# Altium PCB PCB1Copy.PcbDoc
Units mm, origin at the board's own origin, x right, y up, seen from the top; angles counter-clockwise.
Board outline 91.9 x 76.4 mm, 2 copper layers (Top Layer, Bottom Layer), stack 0.211 mm thick; 44 components, 65 nets, 251 pads, 43 vias.
Unrouted connection lines stored in the file: 65.
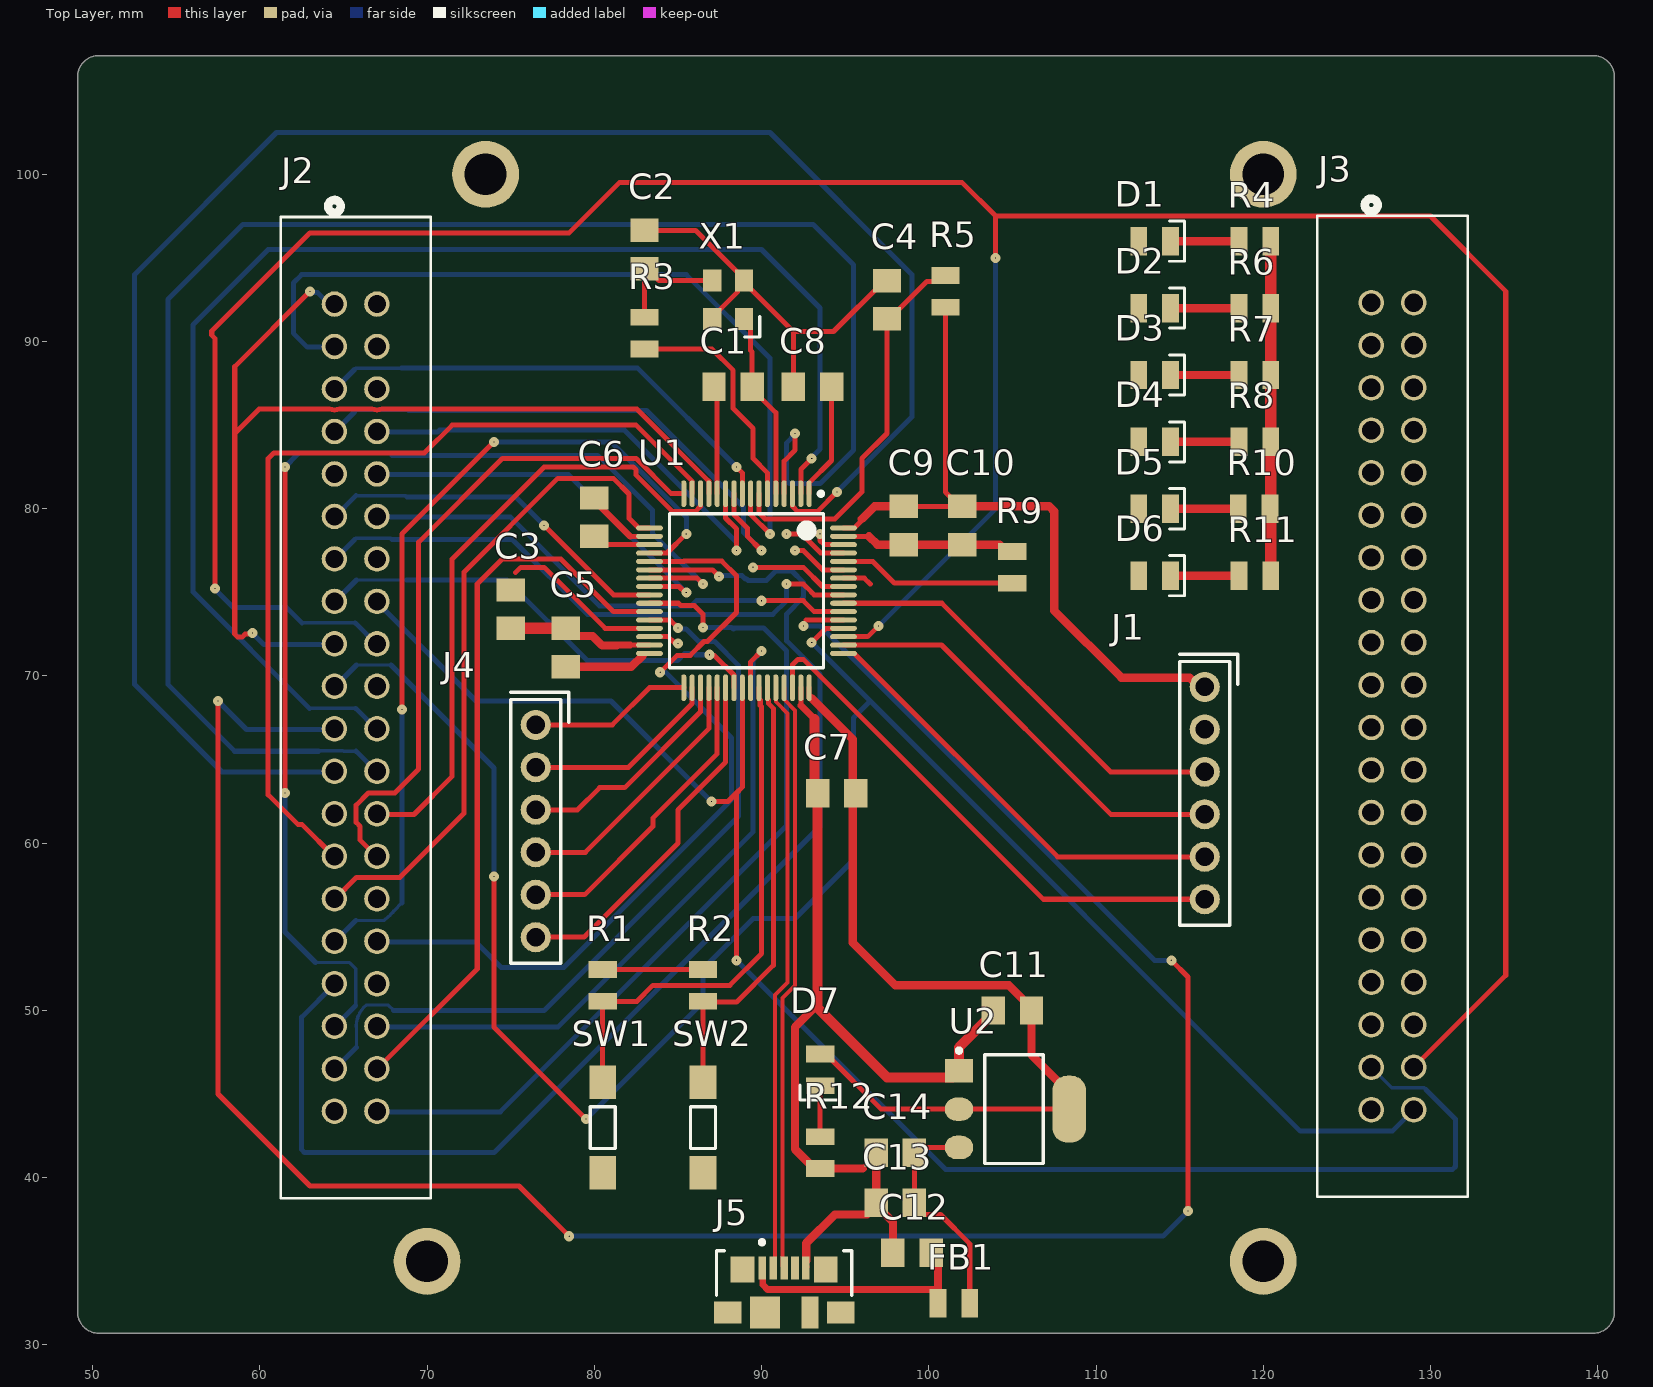
[diagram p0: Top Layer view]
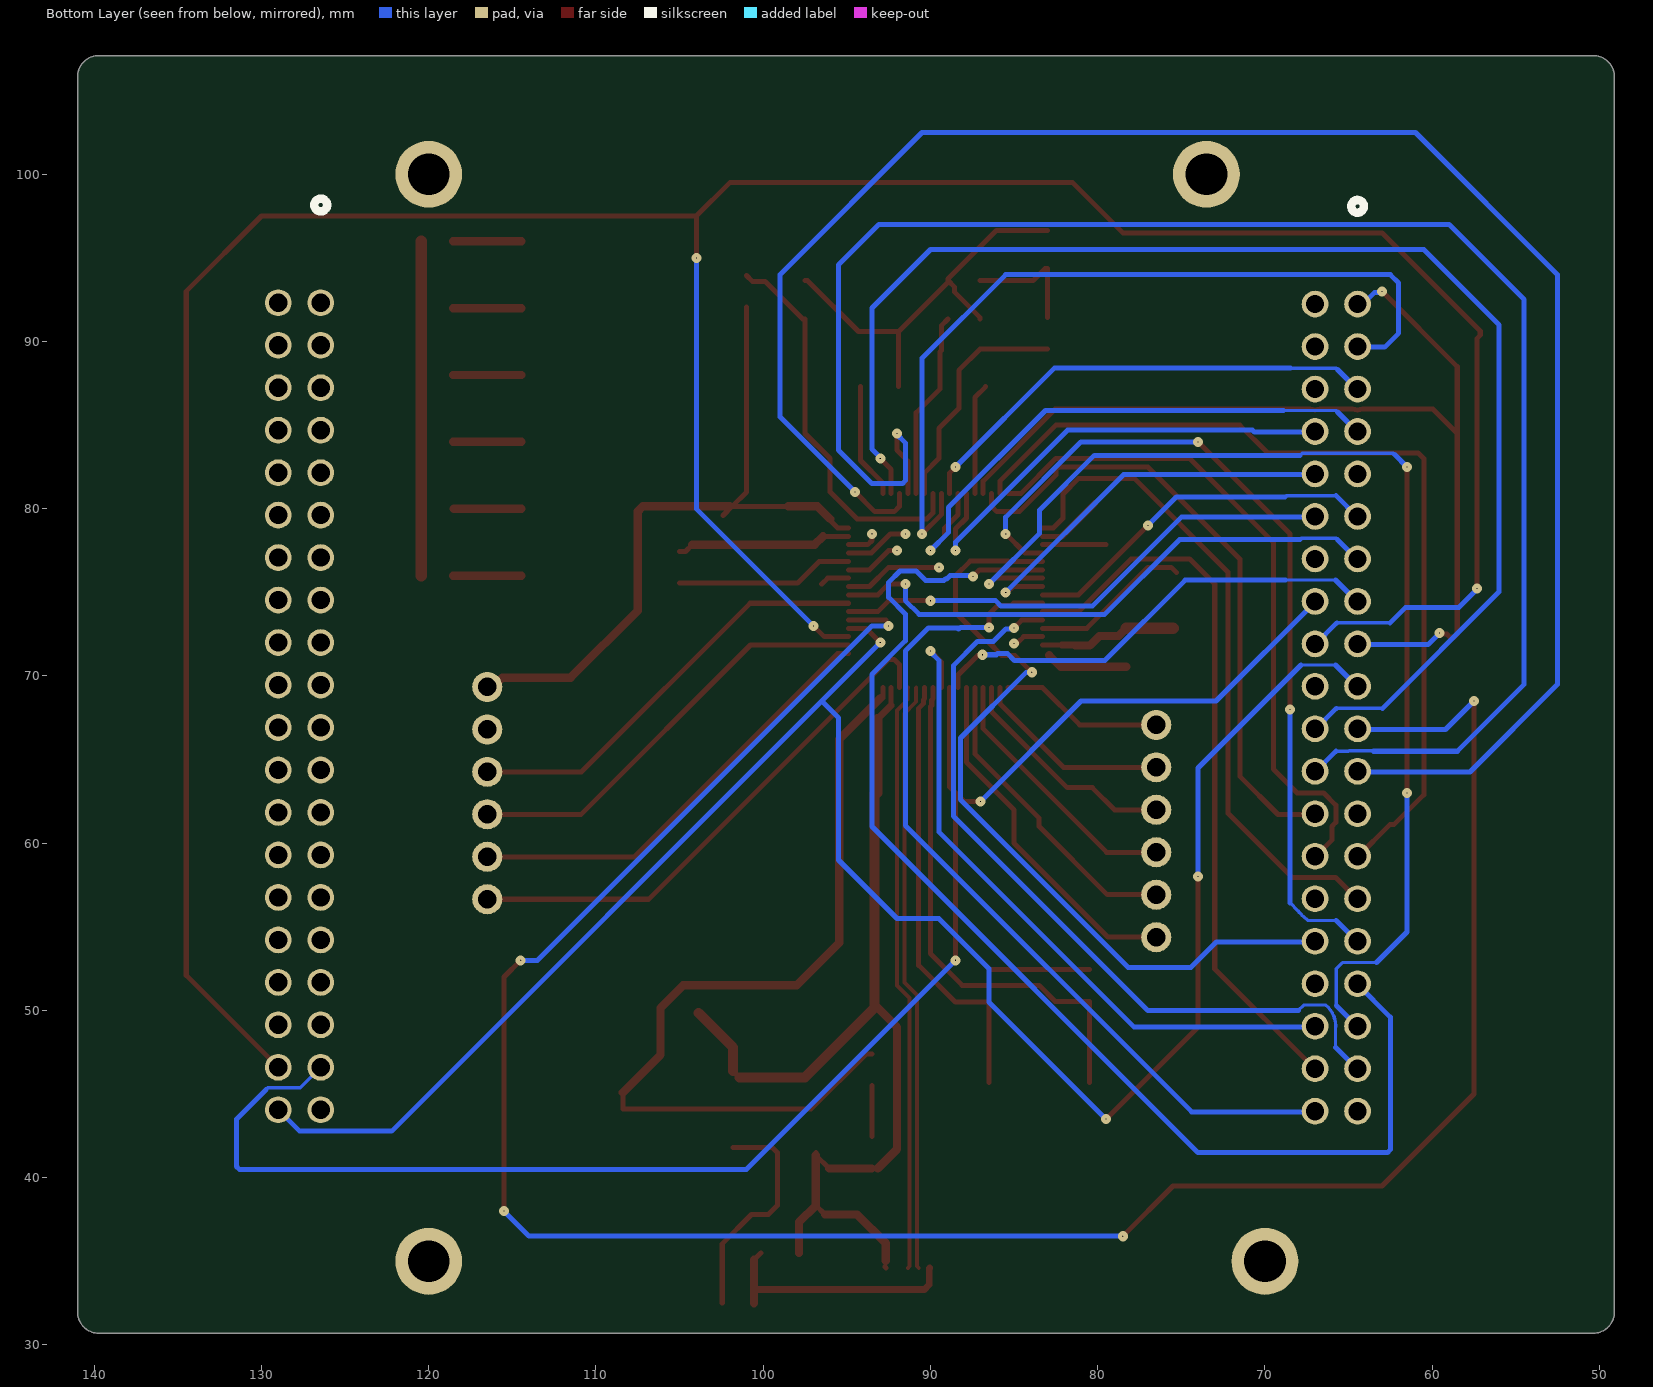
[diagram p1: Bottom Layer view, seen from below]
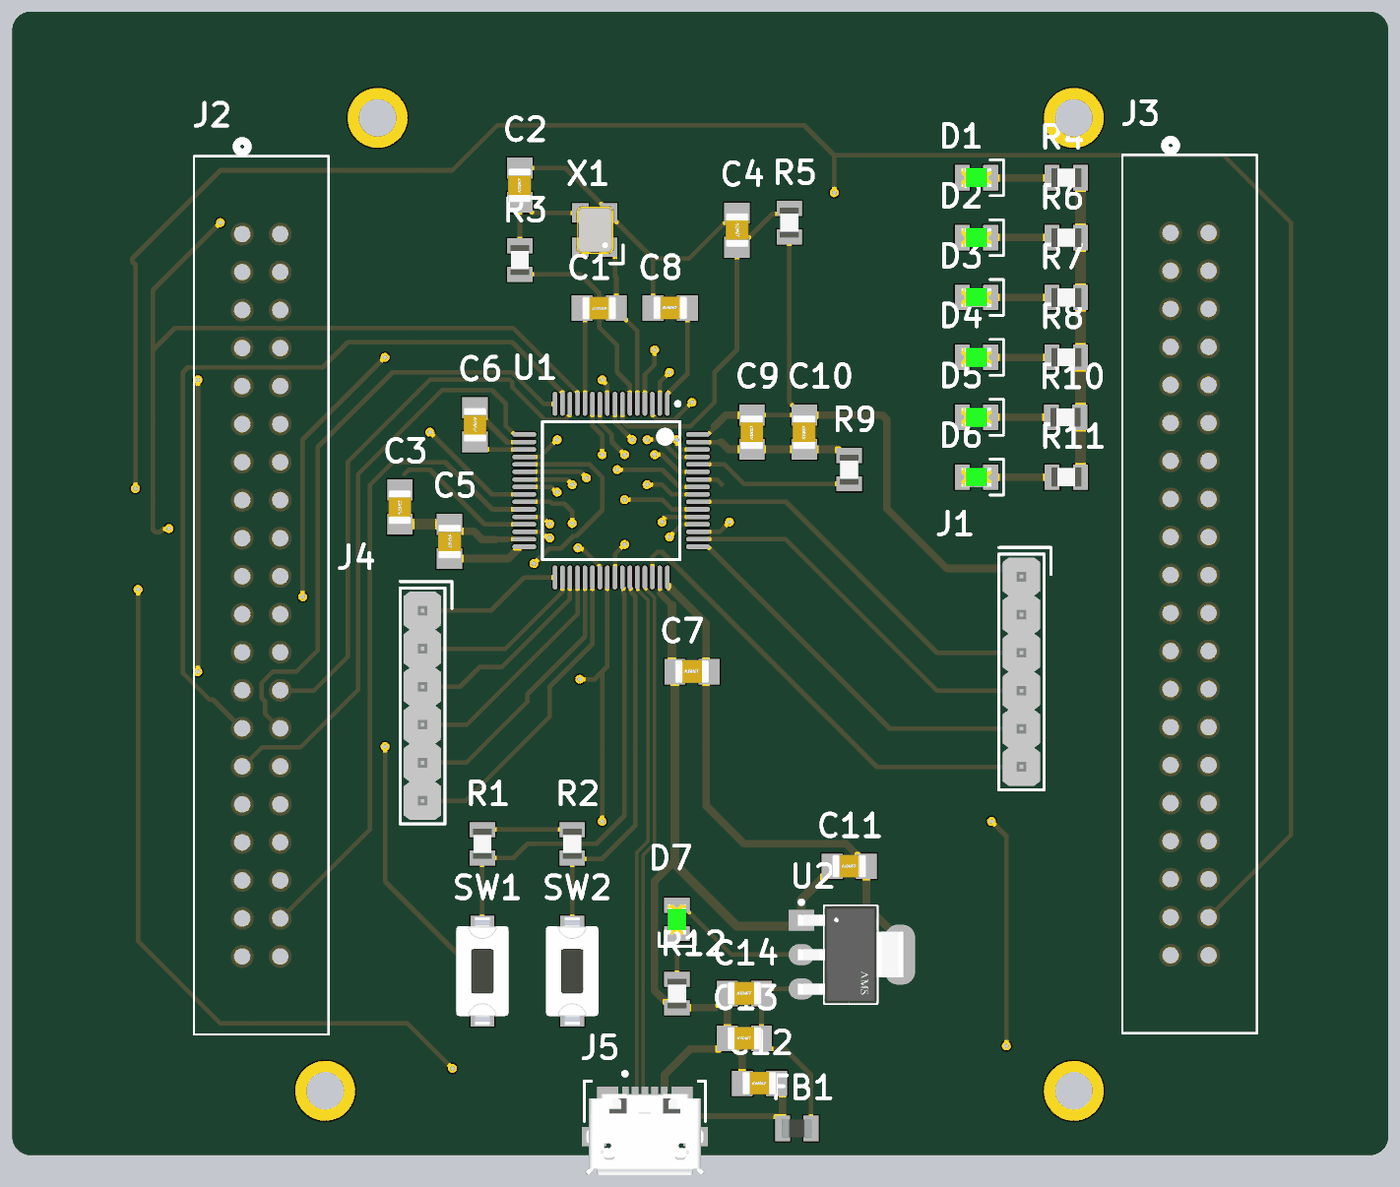
[diagram p2: 3D render of the assembled board from above, using the file's embedded part models]

## Layer stack, top to bottom
Top Solder: solder mask 0.0102, Solder Resist, Dk 3.5
Top Layer: signal copper 0.0356
Dielectric 1: core 0.1397, Core-017, Dk 4.1
Bottom Layer: signal copper 0.0356
Bottom Solder: solder mask 0.0102, Solder Resist, Dk 3.5

## Board outline
49.1,31.97 49.1,105.83 cw(c50.37,105.83) 50.37,107.1 139.73,107.1 cw(c139.73,105.83) 141,105.83 141,31.97 cw(c139.73,31.97) 139.73,30.7 50.37,30.7 cw(c50.37,31.97)

## Design rules (kind name [scope] priority, off if disabled: settings)
Clearance [All] p1: gap=0.254 ignorepadtopadclearanceinfootprint=FALSE except(0: Arc-Hole Track-Hole SMDPad-Hole THPad-Hole Via-Hole Fill-Hole Poly-Hole Region-Hole Text-Hole; 0.127: Arc-Arc Arc-Track Arc-SMDPad Track-Track Track-SMDPad SMDPad-SMDPad; 0.33: Arc-THPad Arc-Via Track-THPad Track-Via SMDPad-THPad SMDPad-Via THPad-Via Via-Via; 0.5: THPad-THPad)
DiffPairsRouting [All] p1: maxlimit=0.2 minlimit=0.2 mostfreqgap=0.2 toplayer_minwidth=0.235 toplayer_maxwidth=0.235 toplayer_prefwidth=0.235 bottomlayer_minwidth=0.235 bottomlayer_maxwidth=0.235 bottomlayer_prefwidth=0.235 impedanceprofiledriven=TRUE impedanceprofileid={3DAFF3E0-E45B-4C19-A753-60FD53768F31} impedanceprofilevalue=90.000000 maxuncoupledlength=12.7
PolygonConnect [All] p1: connectstyle=Direct reliefconductorwidth=0.254 reliefentries=4 polygonreliefangle="90 Angle" airgapwidth=0.254
RoutingVias [All] p1: holewidth=0.3 width=0.7 viastyle="Through Hole" minholewidth=0.25 minwidth=0.55 maxholewidth=0.4 maxwidth=0.9
SolderMaskExpansion [All] p1: expansion=0.102 istentingtop=FALSE
UnRoutedNet [All] p1: checkbadconnections=TRUE
Width [All] p1: maxlimit=1 minlimit=0.13 preferedwidth=0.3 minimp=50.000000 maximp=50.000000 favimp=50.000000
28 further rules are at their usual default settings.

## Classes and differential pairs
differential pair USB_D: +USB_D_P -USB_D_N

## Components (designator, comment, footprint, x,y, rotation, side; value= is the part's Value field where it differs from the comment)
C1 "28pF" CAP_0805 88.3,87.3 r180 top
C2 "28pF" CAP_0805 83,95.5 r90 top
C3 "2.2uF" CAP_0805 75,74 r90 top
C4 "100nF" CAP_0805 97.5,92.5 r270 top
C5 "100nF" CAP_0805 78.3,71.7 r270 top
C6 "100nF" CAP_0805 80,79.5 r270 top
C7 "100nF" CAP_0805 94.5,63 r0 top
C8 "100nF" CAP_0805 93.043,87.3 r0 top
C9 "100nF" CAP_0805 98.5,79 r90 top
C10 "2.2uF" CAP_0805 102,79 r90 top
C11 "22uF" CAP_0805 105,50 r0 top
C12 "2.2uF" CAP_0805 99,35.5 r0 top
C13 "2.2uF" CAP_0805 98,38.5 r0 top
C14 "22uF" CAP_0805 98,41.5 r0 top
D1 "GREEN" LED_0805_GREEN 113.5,96 r180 top
D2 "GREEN" LED_0805_GREEN 113.5,92 r180 top
D3 "GREEN" LED_0805_GREEN 113.5,88 r180 top
D4 "GREEN" LED_0805_GREEN 113.5,84 r180 top
D5 "GREEN" LED_0805_GREEN 113.5,80 r180 top
D6 "GREEN" LED_0805_GREEN 113.5,76 r180 top
D7 "GREEN" LED_0805_GREEN 93.5,46.45 r90 top
FB1 "120R" FB_0805 101.5,32.5 r0 top
J1 "G800W302018EU" G800W302018EU 116.5,63 r0 top
J2 "BUFFER_LOW" CONN_3020-40-0100-00_CNC 64.46,92.24 r270 top
J3 "BUFFER_HIGH" CONN_3020-40-0100-00_CNC 126.46,92.32 r270 top
J4 "G800W302018EU" G800W302018EU 76.5,60.73 r0 top
J5 "473460001" FP-473460001-MFG 91.35,32.29 r0 top
R1 "10k" RES_0805 80.5,51.5 r270 top
R2 "10k" RES_0805 86.5,51.5 r270 top
R3 "0R" RES_0805 83,90.5 r90 top
R4 "1k" RES_0805 119.5,96 r180 top
R5 "10k" RES_0805 101,93 r270 top
R6 "1k" RES_0805 119.5,92 r180 top
R7 "1k" RES_0805 119.5,88 r180 top
R8 "1k" RES_0805 119.5,84 r180 top
R9 "10k" RES_0805 105,76.5 r270 top
R10 "1k" RES_0805 119.45,80 r180 top
R11 "1k" RES_0805 119.5,76 r180 top
R12 "1k" RES_0805 93.5,41.5 r90 top
SW1 "DTSM-3" DTSM-3 80.5,43 r270 top
SW2 "DTSM-3" DTSM-3 86.5,43 r270 top
U1 "STM32F401RBT6TR" STM-LQFP64_L 89.1,75.1 r270 top
U2 "AMS1117-3.3" FP-AMS1117-IPC_C 105.1,44.1 r0 top
X1 "24MHz" XTAL_3225 88,92.5 r90 top

## Footprints (in the part's own frame and the unit in brackets; to place one, negate y for a bottom-side part, rotate by r counter-clockwise, add the part's x,y. Pads: shape width x height; smd on the part's side, far side on the other; paste and mask are expansions set on the pad)
CAP_0805 [mm]
  rect 1.4x1.7 smd: 1(-1.143,0) 2(1.143,0)
  body extent -1.15,-0.76 1.15,0.79, height 1.01
CONN_3020-40-0100-00_CNC [mil]
  round 60 / inner round 60 / far side round 63 hole 43 paste-31.5 mask-31.5: 1(0,0) 2(0,100) 3(100,0) 4(100,100) 5(200,0) 6(200,100) 7(300,0) 8(300,100) 9(400,0) 10(400,100) 11(500,0) 12(500,100) 13(600,0) 14(600,100) 15(700,0) 16(700,100) 17(800,0) 18(800,100) 19(900,0) 20(900,100) 21(1000,0) 22(1000,100) 23(1100,0) 24(1100,100) 25(1200,0) 26(1200,100) 27(1300,0) 28(1300,100) 29(1400,0) 30(1400,100) 31(1500,0) 32(1500,100) 33(1600,0) 34(1600,100) 35(1700,0) 36(1700,100) 37(1800,0) 38(1800,100) 39(1900,0) 40(1900,100)
  silkscreen extent -245,-127 2105,227
DTSM-3 [mm]
  rect 2x1.6 smd: 1(-2.7,0) 2(2.7,0)
  silkscreen extent -1.25,-0.75 1.25,0.75, body extent -3.6,-1.75 3.6,1.75, height 4.96
FB_0805 [mm]
  rect 1x1.7 smd: 1(-0.95,0) 2(0.95,0)
  body extent -1,-0.63 1,0.63, height 0.86
FP-473460001-MFG [mm]
  rect 0.45x1.38 smd paste+0 mask+0: 1(-1.3,2.31) 2(-0.65,2.31) 3(0,2.31) 4(0.65,2.31) 5(1.3,2.31)
  rect 1.425x1.55 smd paste+0 mask+0: 6(-2.488,2.225) 7(2.488,2.225)
  rect 1.65x1.3 smd paste+0 mask+0: 8(-3.375,-0.35) 11(3.375,-0.35)
  rect 1.8x1.9 smd paste+0 mask+0: 9(-1.15,-0.35)
  rect 1x1.9 smd paste+0 mask+0: 10(1.55,-0.35)
  silkscreen extent -4.05,0.67 4.05,3.97, body extent -4.3,-2.48 4.3,3.45, height 0.25
FP-AMS1117-IPC_C [mm]
  rect 1.7x1.4 smd paste+0 mask+0: 1(-3.295,2.29)
  rrect100% 1.7x1.4 smd paste+0 mask+0: 2(-3.295,0) 3(-3.295,-2.29)
  rrect87% 2.004x4 smd paste+0 mask+0: 4(3.295,0)
  silkscreen extent -3.42,-3.25 1.75,3.62, body extent -3.9,-3.35 3.9,3.35, height 0.25
G800W302018EU [mm]
  round 1.8 hole 1.1 mask+0.07: 1(0,6.35) 2(0,3.81) 3(0,1.27) 4(0,-1.27) 5(0,-3.81) 6(0,-6.35)
  silkscreen extent -1.5,-7.9 1.97,8.3, body extent -1.25,-7.62 1.25,7.62, height 8.61
LED_0805_GREEN [mm]
  rect 1x1.7 smd: A(0.95,0) K(-0.95,0)
  silkscreen extent -1.8,-1.2 -0.9,1.2, body extent -1,-0.63 1,0.63, height 1.12
RES_0805 [mm]
  rect 1x1.7 smd: 1(-0.95,0) 2(0.95,0)
  body extent -1,-0.63 1,0.63, height 0.47
STM-LQFP64_L [mm] "QFP, 64-Leads, Body 10x10mm, Pitch 0.5mm, IPC High Density"
  oval 1.6x0.3 smd: 1(-5.8,3.75) 2(-5.8,3.25) 3(-5.8,2.75) 4(-5.8,2.25) 5(-5.8,1.75) 6(-5.8,1.25) 7(-5.8,0.75) 8(-5.8,0.25) 9(-5.8,-0.25) 10(-5.8,-0.75) 11(-5.8,-1.25) 12(-5.8,-1.75) 13(-5.8,-2.25) 14(-5.8,-2.75) 15(-5.8,-3.25) 16(-5.8,-3.75) 33(5.8,-3.75) 34(5.8,-3.25) 35(5.8,-2.75) 36(5.8,-2.25) 37(5.8,-1.75) 38(5.8,-1.25) 39(5.8,-0.75) 40(5.8,-0.25) 41(5.8,0.25) 42(5.8,0.75) 43(5.8,1.25) 44(5.8,1.75) 45(5.8,2.25) 46(5.8,2.75) 47(5.8,3.25) 48(5.8,3.75)
  oval 0.3x1.6 smd: 17(-3.75,-5.8) 18(-3.25,-5.8) 19(-2.75,-5.8) 20(-2.25,-5.8) 21(-1.75,-5.8) 22(-1.25,-5.8) 23(-0.75,-5.8) 24(-0.25,-5.8) 25(0.25,-5.8) 26(0.75,-5.8) 27(1.25,-5.8) 28(1.75,-5.8) 29(2.25,-5.8) 30(2.75,-5.8) 31(3.25,-5.8) 32(3.75,-5.8) 49(3.75,5.8) 50(3.25,5.8) 51(2.75,5.8) 52(2.25,5.8) 53(1.75,5.8) 54(1.25,5.8) 55(0.75,5.8) 56(0.25,5.8) 57(-0.25,5.8) 58(-0.75,5.8) 59(-1.25,5.8) 60(-1.75,5.8) 61(-2.25,5.8) 62(-2.75,5.8) 63(-3.25,5.8) 64(-3.75,5.8)
  silkscreen extent -5.92,-4.6 4.6,4.6, body extent -5,-5 5,5, height 1.6
XTAL_3225 [mm]
  rect 1.3x1.1 smd: 1(-1.15,-0.95) 2(1.15,-0.95) 3(1.15,0.95) 4(-1.15,0.95)
  silkscreen extent -2.23,-1.89 -1,-1, body extent -1.6,-1.28 1.6,1.22, height 0.61

## Part data
C1 C2 C3 C4 C5 C6 C7 C8 C9 C10 C11 C12 C13 C14: library part CAP_0805_16V, "Capacitor SMD 0805 16V"
D1 D2 D3 D4 D5 D6 D7: library part LED_0805_GREEN, "LED 0805 GREEN SMD"
FB1: library part FB_0805, "Ferrite Bead SMD 0805"
J1 J4: "Pin Header 6 Position 2.54mm Pitch", Manufacturer=Amphenol, Manufacturer Part Number=G800W302018EU
J2 J3: library part 3020-40-0100-00, "No Description Available", Mfr_Name="CNC Tech", RefDes=RefDes, Type=Type
J5: library part CMP-2000-05246-2, "CONN RCPT USB2.0 MICRO B SMD R/A", Current Rating=1.8A, Manufacturer=Molex, Package=0, Temperature="-30°C to +85°C", Temperature Range High=+85°C, Temperature Range Low=-30°C, Voltage Rating=30V, Automotive=No, Category=Conn, ComponentLink2Description=Datasheet, ComponentLink2URL=https://www.molex.com/webdocs/datasheets/pdf/en-us/0473460001_IO_CONNECTORS.pdf, Conn Orientation="Right Angle", Contact Material=Gold,Nickel, Device Class L1=Connectors, Device Class L2="USB Connectors", Device Class L3=unset, Digikey Description="CONN RCPT USB2.0 MICRO B SMD R/A", Footprint Url=https://www.molex.com/pdm_docs/sd/473460001_sd.pdf, Height=2.945mm, Is Female=yes, Lead Free=Yes, Manufacturer Part Number=473460001, Number Of Contacts=5, Octopart=https://octopart.com/47346-0001-molex-7164928, Pitch=0.65mm, RoHS=TRUE, Shielding=true, Usb Standard="USB 2.0"
R1 R2 R3 R4 R5 R6 R7 R8 R9 R10 R11 R12: library part RES_0805, "Resistor SMD 0805"
SW1 SW2: "Tactile Switch SMD SPST", Manufacturer=Diptronics, Manufacturer Part Number=DTSM-3
U1: library part CMP-0243-00143-1, "ARM Cortex-M4 32-bit MCU+FPU, 128 KB Flash, 64 KB Internal RAM, 50 I/Os, 64-Pin LQFP, -40 to 85 degC, Tape and Reel", I/Os (High Current)=50, Operating Frequency(F) (Processor speed) (MHz)=84, Package Description=LQFP64, Package Reference="64-Pin Low-profile Quad Flat Package, Body 10 x 10 mm, Pitch 0.5 mm", Supply Voltage(Vcc) min (V)=1.7, ComponentLink1Description="Manufacturer URL", ComponentLink1URL=http://www.st.com/, ComponentLink2Description=Datasheet, ComponentLink2URL=http://www.st.com/st-web-ui/static/active/en/resource/technical/document/datasheet/DM00086815.pdf, Core="ARM Cortex-M4", DatasheetVersion="Rev. 5", FLASH Size (Prog) (kB)=128, Internal RAM Size (kB)=64, Mounting Technology="Surface Mount", Packing="Tape and Reel"
U2: library part CMP-209535-000001-1, "LDO Voltage Regulators 1A, 3.3V", Dropout Voltage=1.1V, Manufacturer="Advanced Monolithic Systems", Max Junction Temp=+125°C, Max Power Dissipation=1.2W, Max Supply Voltage=15V, Nominal Supply Current=5mA, Output Current=1A, Output Voltage=3.3V, Package=AMS1117, Temperature="-40°C to +125°C", Temperature Range Low=-40°C, Automotive=No, Category=IC, ComponentLink2Description=Datasheet, ComponentLink2URL=http://www.advanced-monolithic.com/pdf/ds1117.pdf, Device Class L1="Integrated Circuits (ICs)", Device Class L2="Power Management ICs", Device Class L3="Voltage Regulators - Linear", Height=1.8mm, Ipc Land Pattern Name=SOT229P700X180-4, Lead Free=Yes, Manufacturer Part Number=AMS1117-3.3, Number Of Outputs=1, Octopart=https://octopart.com/ams1117-3.3-advanced+monolithic+systems-25899300, Output Type=Fixed, RoHS=TRUE, Standoff Height=0.64mm, Temperature Range High=+125°C
X1: library part TSX-3225_24.0000MF15X-AC, "Crystal SMD 24MHz 10PPM 7pF 3225", Manufacturer=Epson, Manufacturer Part Number="TSX-3225 24.0000MF15X-AC"

## Free pads (board coordinates)
  round 4 hole 2.5: 1(70,35) 1(73.5,100) 1(120,35) 1(120,100)

## Via types
v1: diameter 0.6, hole 0, Top Layer to Bottom Layer, 43 vias

## Nets (pads, with @x,y where several pads share a name; then routed paths per layer and width w, separated by ;. In a path a pad name is that pad's centre, name@x,y a point inside that pad or via, vN(x,y) a via of type N, cw(c..) or ccw(c..) an arc to the next point about the centre after c; other vN are vias at no path point)
3V3: C5.2 C6.2 C7.2 C8.2 C9.2 C10.2 C11.2 D7.A J1.1 J2.1 J2.17 J3.1 J3.17 R5.2 SW1.2 SW2.2 U1.1 U1.13 U1.19 U1.32 U1.48 U1.64 U2.2 U2.4 | length 172.7
  Top Layer w0.3: v1(59.566,72.566) 59.509,72.509 59.128,72.509 58.943,72.324 58.676,72.324 58.5,72.5 58.5,84.5 ; v1(63,93) 58.5,88.5 58.5,84.5 ; C6.2@79.5,77.857 79.507,77.85 U1.19 ; U1.13 86.85,81.654 82.549,85.955 67.301,85.955 cw(c67,87.16) 66.699,85.955 64.761,85.955 cw(c64.46,87.16) 64.159,85.955 59.955,85.955 58.5,84.5 ; U1.48 92.85,68.685 U1.48@92.98,68.685 ; U1.1 92.85,81.55 94.186,82.886 C8.2 ; D7.A 93.85,47.4 97.15,44.1 U2.2 U2.4 U2.4@108.395,45.098 ; U1.64 95.55,78.85 96,79.3 96,79.388 ; 96.755,80.143 96.843,80.143 ; C9.2 C10.2@101.85,80.143 ; R5.2 101,80.993 C10.2@101.85,80.143 ; C10.2@102.4,79.593 C10.2@101.85,80.143 ; C11.2 C11.2@106.143,50.15
  Top Layer w0.5: C5.2 82.219,70.557 U1.32@82.9,71.238 ; U1.48@92.98,68.685 95.443,66.222 95.443,54.057 98,51.5 104.793,51.5 C11.2@106.143,50.15 ; 96,79.388 96.755,80.143 ; 96.843,80.143 C9.2 ; C10.2 107.207,80.143 107.5,79.85 107.5,73.912 111.512,69.9 115.598,69.9 116.148,69.35 J1.1 ; C11.2 106.143,47.35 U2.4@108.395,45.098
  Bottom Layer w0.3: v1(59.566,72.566) 59.566,72.549 60.235,71.88 J2.17@64.46,71.88 ; v1(63,93) 63.057,92.943 63.435,92.943 64.177,92.2 J2.1@64.46,92.2
5V: C13.2 C14.2 FB1.2 U2.3 | length 13.8
  Top Layer w0.3: U2.3 99.453,41.81 C14.2 C13.2 99.143,38.35 99.693,37.8 100.7,37.8 102.45,36.05 FB1.2
GND: C1.2 C2.2 C3.1 C4.1 C5.1 C6.1 C7.1 C8.1 C9.1 C10.1 C11.1 C12.1 C13.1 C14.1 J1.2 J2.6 J2.9 J2.14 J2.20 J2.25 J2.30 J2.34 J2.39 J3.6 J3.9 J3.14 J3.20 J3.25 J3.30 J3.34 J3.39 J5.5 R1.1 R2.1 R4.1 R6.1 R7.1 R8.1 R9.1 R10.1 R11.1 R12.1 U1.12 U1.18 U1.31 U1.47 U1.63 U2.1 X1.2 X1.4 | length 141.9
  Top Layer w0.3: C5.1@78.286,72.857 C5.1 ; R1.1 R2.1 ; 82.148,71.852 82.15,71.85 U1.31 ; 82.15,78.35 U1.18 ; C2.2 86.057,96.643 88.95,93.75 X1.2 ; C1.2@86.7,87.3 87.35,86.65 U1.12 ; X1.4 87.05,91.45 88.55,92.95 88.55,93.25 X1.2 ; C8.1 91.9,90.6 ; 92.35,68.239 U1.47 ; J5.5 J5.5@92.725,34.675 ; R12.1@93.15,40.55 R12.1 ; U1.63 96.428,78.35 ; 96.057,40.55 96.857,41.35 C14.1 ; C13.1@96.307,37.8 96.857,38.35 C13.1 ; C4.1 97.35,93.643 94.307,90.6 91.9,90.6 ; U2.1@101.415,46 U2.1 ; C11.1@103.857,49.85 C11.1 ; R9.1@104.243,77.857 104.65,77.45 R9.1 ; X1.2 88.95,93.55 91.9,90.6
  Top Layer w0.4: C6.1@80.176,80.324 82.15,78.35 ; 81.347,71.823 81.376,71.852 82.148,71.852 ; 92.35,68.239 93.157,67.432
  Top Layer w0.5: C5.1 78.75,72.393 79.9,72.393 80.47,71.823 81.347,71.823 ; J5.5@92.669,35.04 92.669,36.082 94.388,37.8 C13.1@96.307,37.8 ; R12.1@93.15,40.55 92,41.7 92,49 93.357,50.357 ; R12.1 96.057,40.55 ; 96.428,78.35 96.922,77.857 C9.1 C10.1 R9.1@104.243,77.857 ; C13.1@96.857,38.35 97.857,37.35 C12.1 ; C13.1 C14.1@96.857,41.35
  Top Layer w0.6: C7.1@93.157,63 93.157,67.432 ; C7.1 93.357,50.143 97.5,46 U2.1@101.415,46 ; U2.1 101.805,47.798 C11.1@103.857,49.85
  Top Layer w0.7: C3.1@75.5,72.857 C5.1@78.286,72.857 ; R11.1 R8.1 R7.1 R6.1 R4.1
GPIO_3: J2.3 J3.26 U1.8 | length 50
  Top Layer w0.3: U1.8 89.35,79.65 v1(90.5,78.5)
  Bottom Layer w0.3: J2.3@64.46,89.66 62.84,89.66 62,90.5 62,93.5 62.5,94 85.5,94 90.5,89 v1(90.5,78.5)
GPIO_5: J2.5 J3.27 U1.9 | length 28.8
  Top Layer w0.3: v1(88.5,82.5) 88.85,82.15 U1.9
  Bottom Layer w0.2: 65.664,88.324 65.738,88.398 68.458,88.398
  Bottom Layer w0.3: J2.5@64.46,87.12 65.664,88.324 ; 68.458,88.425 82.575,88.425 v1(88.5,82.5)
GPIO_7: J2.7 J3.28 U1.10 | length 34.5
  Top Layer w0.3: U1.10 88.35,79.65 89.146,78.854 89.146,78.354 v1(90,77.5)
  Bottom Layer w0.2: 65.664,85.784 65.759,85.879 68.879,85.879
  Bottom Layer w0.3: J2.7@64.46,84.58 65.664,85.784 ; 68.879,85.879 83.121,85.879 88.927,80.073 88.927,78.573 v1(90,77.5)
GPIO_8: J2.8 J3.29 U1.11 | length 28.5
  Top Layer w0.3: U1.11 87.85,79.45 88.5,78.8 v1(88.5,77.5)
  Bottom Layer w0.3: J2.8@67,84.58 70.634,84.58 70.758,84.704 81.796,84.704 88.5,78 v1(88.5,77.5)
GPIO_10: J2.10 J3.31 U1.24 | length 23.8
  Top Layer w0.3: U1.24 85.069,75.35 85.419,75 v1(85.5,75)
  Bottom Layer w0.3: J2.10@67,82.04 78.46,82.04 v1(85.5,75)
GPIO_11: J2.11 J3.32 U1.25 | length 21.8
  Top Layer w0.3: v1(77,79) 81.15,74.85 U1.25
  Bottom Layer w0.2: 65.743,80.783 68.717,80.783 68.796,80.704
  Bottom Layer w0.3: J2.11@64.46,79.5 65.743,80.783 ; 68.796,80.704 75.296,80.704 v1(77,79)
GPIO_12: J2.12 J3.33 U1.54 | length 30.5
  Top Layer w0.3: v1(90,74.5) 92.5,74.5 93.15,73.85 U1.54
  Bottom Layer w0.3: J2.12@67,79.5 75,79.5 80.325,74.175 85.778,74.175 86.103,74.5 v1(90,74.5)
GPIO_13: J2.13 J3.35 U1.56 | length 34.5
  Top Layer w0.3: v1(91.5,75.5) 92.5,75.5 93,75 ; 93.001,74.999 93.15,74.85 U1.56
  Bottom Layer w0.2: 65.655,78.155 65.73,78.23 67.831,78.23 67.906,78.155
  Bottom Layer w0.3: J2.13@64.46,76.96 65.655,78.155 ; 67.906,78.155 75.111,78.155 79.583,73.683 90.679,73.683 91.5,74.504 v1(91.5,75.5)
GPIO_15: J2.15 J3.36 U1.39 | length 27.9
  Top Layer w0.3: v1(86.878,71.271) 86.936,71.213 87.191,71.213 88.35,70.054 U1.39
  Bottom Layer w0.2: 65.778,75.738 68.762,75.738 68.773,75.727
  Bottom Layer w0.3: J2.15@64.46,74.42 65.778,75.738 ; 68.773,75.727 74.773,75.727 79.573,70.927 84.981,70.927 85.408,71.354 85.978,71.354 86.062,71.271 v1(86.878,71.271)
GPIO_16: J2.16 J3.37 U1.40 | length 100.7
  Top Layer w0.3: v1(87,62.5) 87.002,62.498 87.998,62.498 88.5,63 ; v1(88.5,53) 88.5,63 ; U1.40 88.85,63.35 88.5,63
  Bottom Layer w0.2: J3.37 127.69,45.37 129.63,45.37 129.736,45.264
  Bottom Layer w0.3: J2.16@67,74.42 72.92,68.5 81,68.5 v1(87,62.5) ; v1(88.5,53) 101,40.5 131.324,40.5 131.5,40.676 131.5,43.5 129.736,45.264 ; J3.37 J3.37@126.674,46.6
GPIO_18: J2.18 J3.38 U1.51 | length 188.5
  Top Layer w0.3: v1(57.327,75.237) 57.327,90.173 57.124,90.376 57.124,90.624 63,96.5 78.5,96.5 81.5,99.5 102,99.5 104,97.5 ; U1.51 96.35,72.35 v1(97,73) ; v1(104,95) 104,97.5 ; J3.38 134.5,52.1 134.5,93 130,97.5 104,97.5
  Bottom Layer w0.2: 62.513,73.177 65.703,73.177
  Bottom Layer w0.3: v1@57.5,75 58.392,74.108 61.582,74.108 62.513,73.177 ; 65.703,73.177 J2.18@67,71.88 ; v1(97,73) 104,80 v1(104,95)
GPIO_19: J2.19 J3.40 U1.52 | length 120.3
  Top Layer w0.3: v1(74,58) 74,49 v1(79.5,43.5) ; v1(93,72) 93.85,72.85 U1.52
  Bottom Layer w0.2: 65.781,70.661 67.839,70.661
  Bottom Layer w0.3: J2.19@64.46,69.34 65.781,70.661 ; 67.839,70.661 74,64.5 v1(74,58) ; v1(79.5,43.5) 86.5,50.5 86.5,52.5 89.5,55.5 92,55.5 95.5,59 95.5,67.5 96.5,68.5 ; v1(93,72) 96.5,68.5 ; J3.40 127.72,42.78 122.22,42.78 96.5,68.5
GPIO_21: J2.21 J3.3 U1.53 | length 141.3
  Top Layer w0.3: v1(57.5,68.5) 57.5,45 63,39.5 75.5,39.5 v1(78.5,36.5) ; 92.65,73.35 U1.53 ; v1(114.5,53) 115.5,52 v1(115.5,38)
  Bottom Layer w0.3: v1(57.5,68.5) 59.2,66.8 J2.21@64.46,66.8 ; v1(78.5,36.5) 114,36.5 v1(115.5,38) ; v1(92.5,73) 93.5,73 113.5,53 v1(114.5,53)
GPIO_22: J2.22 J3.5 U1.2 | length 82.8
  Top Layer w0.3: U1.2 92.35,82.35 v1(93,83)
  Bottom Layer w0.2: 62.959,68.071 65.729,68.071
  Bottom Layer w0.3: 62.959,68.071 55.999,75.03 55.999,90.999 60.5,95.5 90,95.5 93.5,92 93.5,83.561 93,83.061 v1(93,83) ; 65.729,68.071 J2.22@67,66.8
GPIO_23: J2.23 J3.7 U1.3 | length 111.1
  Top Layer w0.3: U1.3 91.85,80.146 92.173,79.823 93.323,79.823 v1(94.5,81)
  Bottom Layer w0.3: J2.23@64.46,64.26 57.74,64.26 52.5,69.5 52.5,94 61,102.5 90.5,102.5 99,94 99,85.5 v1(94.5,81)
GPIO_24: J2.24 J3.8 U1.4 | length 104.5
  Top Layer w0.3: U1.4 91.35,82.85 92,83.5 v1(92,84.5)
  Bottom Layer w0.2: 63.5,65.5 63.53,65.53 64.97,65.53 65,65.5 65.76,65.5
  Bottom Layer w0.3: 63.5,65.5 58.5,65.5 54.5,69.5 54.5,92.515 58.985,97 93.085,97 95.5,94.585 95.5,83.5 93.5,81.5 91.676,81.5 91.5,81.676 91.5,83.939 92,84.439 v1(92,84.5) ; 65.76,65.5 J2.24@67,64.26
GPIO_26: J2.26 J3.10 U1.14 | length 37.8
  Top Layer w0.3: J2.26@67,61.72 69.22,61.72 71.5,64 71.5,77 77,82.5 82.324,82.5 82.5,82.324 82.5,82.004 84.681,79.823 86.027,79.823 86.35,80.146 U1.14
GPIO_27: J2.27 J3.11 U1.15 | length 53.9
  Top Layer w0.3: 63.136,83.338 60.838,83.338 60.5,83 60.5,62.897 62.269,61.128 62.512,61.128 J2.27@64.46,59.18 ; 63.136,83.342 63.139,83.338 69.838,83.338 71.5,85 82.504,85 85.85,81.654 U1.15
GPIO_28: J2.28 J3.12 U1.16 | length 40.6
  Top Layer w0.3: J2.28@67,59.18 66,60.18 66,61.004 65.758,61.246 65.758,62.274 66.491,63.008 68.067,63.008 69.5,64.441 69.5,78 74.5,83 82.5,83 84.6,80.9 U1.16
GPIO_29: J2.29 J3.13 U1.17 | length 39.8
  Top Layer w0.3: J2.29@64.46,56.64 65.778,57.958 68.377,57.958 72.212,61.793 72.212,76.212 77.822,81.822 81.135,81.822 82.07,80.887 82.07,79.43 82.65,78.85 U1.17
GPIO_31: J2.31 J3.15 U1.20 | length 51.9
  Top Layer w0.3: v1(68.5,68) 68.5,78.5 v1(74,84) ; U1.20 84.35,77.35 v1(85.5,78.5)
  Bottom Layer w0.2: 65.743,55.383 67.445,55.383 67.674,55.611 ccw(c67,56.64) 68.029,55.966 68.5,56.437
  Bottom Layer w0.3: J2.31@64.46,54.1 65.743,55.383 ; 68.5,56.437 v1(68.5,68) ; v1(74,84) 81,84 85.5,79.5 v1(85.5,78.5)
GPIO_32: J2.32 J3.16 U1.21 | length 49.4
  Top Layer w0.3: U1.21 85.35,76.85 85.367,76.867 87.629,76.867 88.5,75.996 88.5,73.8 86.758,72.058 86.563,72.058 85.742,71.238 84.956,71.238 v1(83.941,70.223)
  Bottom Layer w0.3: J2.32@67,54.1 72.9,54.1 74.427,52.573 78.176,52.573 88.204,62.601 88.204,66.296 84.277,70.223 v1(83.941,70.223)
GPIO_33: J2.33 J3.18 U1.22 | length 75.7
  Top Layer w0.3: U1.22 87.069,76.35 87.446,75.973 v1(87.446,75.946)
  Bottom Layer w0.3: J2.33@64.46,51.56 62.5,49.6 62.5,41.676 62.676,41.5 74,41.5 93.5,61 93.5,70.104 91.5,72.104 91.5,73.706 92.5,74.706 92.5,75.603 91.823,76.28 90.856,76.28 90.296,75.72 89.177,75.72 89.101,75.796 89.038,75.796 88.834,76 87.5,76 v1(87.446,75.946)
GPIO_35: J2.35 J3.19 U1.23 | length 69.7
  Top Layer w0.3: v1(61.5,63) v1(61.5,82.5) ; U1.23 86.15,75.85 v1(86.5,75.5)
  Bottom Layer w0.2: 62.244,83.244 62.31,83.31 67.771,83.31 67.89,83.192 ; 63.331,52.866 65.362,52.866 65.731,52.497 65.731,50.291
  Bottom Layer w0.3: v1(61.5,63) 61.5,54.696 63.331,52.866 ; v1(61.5,82.5) 62.244,83.244 ; J2.35@64.46,49.02 65.731,50.291 ; 67.89,83.192 80.204,83.192 83.471,79.925 83.471,78.529 v1(86.5,75.5)
GPIO_36: J2.36 J3.21 U1.41 | length 40.8
  Top Layer w0.3: U1.41 89.35,70.85 v1(90,71.5)
  Bottom Layer w0.3: J2.36@67,49.02 77.84,49.02 89.5,60.68 89.5,70.939 90,71.439 v1(90,71.5)
GPIO_37: J2.37 J3.22 U1.28 | length 47.3
  Top Layer w0.3: U1.28 84.55,73.35 84.55,73.327 v1(85,72.877)
  Bottom Layer w0.2: 65.778,48.881 cw(c67.385,49.064) 66.37,50.323 67.677,50.323 68,50 ; 65.778,47.798 65.778,48.881
  Bottom Layer w0.3: J2.37@64.46,46.48 65.778,47.798 ; 68,50 77,50 88.631,61.631 88.631,70.621 87.194,72.058 86.242,72.058 85.481,72.82 85.057,72.82 v1(85,72.877)
GPIO_38: J2.38 J3.23 U1.27 | length 43.7
  Top Layer w0.3: J2.38@67,46.48 73,52.48 73,75.5 74.5,77 78,77 81.15,73.85 U1.27
GPIO_40: J2.40 J3.24 U1.26 | length 51.9
  Top Layer w0.3: U1.26 85.047,74.35 85.177,74.22 85.98,74.22 86.5,73.7 v1(86.5,72.903)
  Bottom Layer w0.3: J2.40@67,43.94 74.375,43.94 91.5,61.065 91.5,71.5 90.131,72.869 88.393,72.869 88.32,72.796 88.212,72.903 v1(86.5,72.903)
LED_1: D1.A U1.57 | length 5.9
  Top Layer w0.3: v1(89.5,76.5) 92.5,76.5 93.65,75.35 U1.57
LED_2: D2.A U1.58 | length 1.7
  Top Layer w0.3: U1.58 96.15,75.85 96.5,75.5
LED_3: D3.A U1.59 | length 3.4
  Top Layer w0.3: v1(92,77.5) 92.5,77.5 93.65,76.35 U1.59
LED_4: D4.A U1.61 | length 3.9
  Top Layer w0.3: v1(91.5,78.5) 92.385,78.5 93.535,77.35 U1.61
LED_5: D5.A U1.62 | length 1.9
  Top Layer w0.3: v1(93.485,78.503) 93.5,78.488 93.5,78.104 93.754,77.85 U1.62
LED_6: D6.A U1.29 | length 9.6
  Top Layer w0.3: 75.302,76.198 75.604,76.5 77,76.5 80.65,72.85 U1.29
LED_PWR_K: D7.K R12.2 | length 3
  Top Layer w0.3: R12.2 D7.K
MCU_BOOT: R9.2 U1.60 | length 10.6
  Top Layer w0.3: U1.60 96.65,76.85 97.95,75.55 R9.2
MCU_JTDI: J1.4 U1.50 | length 25.8
  Top Layer w0.3: U1.50 100.762,71.85 110.882,61.73 J1.4
MCU_NRST: C4.2 R5.1 U1.7 | length 23.7
  Top Layer w0.3: U1.7 89.85,79.754 90.208,79.396 94.396,79.396 96,81 96,83 97.5,84.5 C4.2 97.65,91.357 99.893,93.6 100.65,93.6 R5.1
MCU_OSC_IN: C1.1 U1.5 X1.1 | length 11.2
  Top Layer w0.3: X1.1 89.35,90.95 89.35,89.471 89.443,89.378 C1.1 89.443,87.15 90.85,85.743 U1.5
MCU_OSC_OUT: R3.1 U1.6 | length 14.1
  Top Layer w0.3: R3.1 87.028,89.55 88.3,88.278 88.3,86 89.5,84.8 89.5,83 90.35,82.15 U1.6
MCU_PIN_1: J4.1 U1.33 | length 9.8
  Top Layer w0.3: J4.1 81.08,67.08 83.3,69.3 U1.33
MCU_PIN_2: J4.2 U1.34 | length 11.9
  Top Layer w0.3: J4.2 82.04,64.54 85.85,68.35 U1.34
MCU_PIN_3: J4.3 U1.35 | length 13.7
  Top Layer w0.3: J4.3 79,62 80.324,63.324 81.814,63.324 86.35,67.86 U1.35
MCU_PIN_4: J4.4 U1.36 | length 15.9
  Top Layer w0.3: J4.4 79.46,59.46 86.85,66.85 U1.36
MCU_PIN_5: J4.5 U1.37 | length 18.6
  Top Layer w0.3: J4.5 79.42,56.92 83.5,61 83.5,61.5 87.35,65.35 U1.37
MCU_PIN_6: J4.6 U1.38 | length 21.3
  Top Layer w0.3: J4.6 79.38,54.38 85,60 85,62 87.85,64.85 U1.38
MCU_SWCLK: J1.5 U1.49 | length 26.6
  Top Layer w0.3: U1.49 95.55,71.35 107.71,59.19 J1.5
MCU_SWDIO: J1.6 U1.46 | length 32.1
  Top Layer w0.3: U1.46 91.85,70.674 92.176,71 92.5,71 106.85,56.65 J1.6
MCU_SWITCH_1: R1.2 SW1.1 U1.42 | length 31.5
  Top Layer w0.3: SW1.1 R1.2 82.55,50.55 83.5,51.5 88.103,51.5 90,53.397 90,68.164 89.923,68.241 89.923,68.577 89.85,68.65 U1.42
MCU_SWITCH_2: R2.2 SW2.1 U1.43 | length 26.7
  Top Layer w0.3: SW2.1 R2.2 86.55,50.5 88.5,50.5 90.704,52.704 90.704,68.064 90.423,68.345 90.423,68.577 90.35,68.65 U1.43
MCU_SWO: J1.3 U1.55 | length 25.8
  Top Layer w0.3: U1.55 100.782,74.35 110.862,64.27 J1.3
NetC3_2: C3.2 U1.30 | length 1.9
  Top Layer w0.3: U1.30 84.424,72.35 84.775,71.999 84.943,71.999 v1(85,71.942)
NetD1_K: D1.K R4.2 | length 4.1
  Top Layer w0.5: D1.K R4.2
NetD2_K: D2.K R6.2 | length 4.1
  Top Layer w0.5: D2.K R6.2
NetD3_K: D3.K R7.2 | length 4.1
  Top Layer w0.5: D3.K R7.2
NetD4_K: D4.K R8.2 | length 4.1
  Top Layer w0.5: D4.K R8.2
NetD5_K: D5.K R10.2 | length 4
  Top Layer w0.5: D5.K R10.2
NetD6_K: D6.K R11.2 | length 4.1
  Top Layer w0.5: D6.K R11.2
USB_D_N: J5.2 U1.44 | length 35.4
  Top Layer w0.235: J5.2 90.807,34.707 90.807,35.471 90.807,50.923 91.565,51.68 91.565,67.762 90.927,68.399 90.862,68.464 90.862,69.288 U1.44
USB_D_P: J5.3 U1.45 | length 35.3
  Top Layer w0.235: J5.3 91.243,34.707 91.243,50.743 92,51.5 92,67.942 91.362,68.58 91.362,69.288 U1.45
VBUS: C12.2 FB1.1 J5.1 | length 14.8
  Top Layer w0.3: C12.2 C12.2@100.55,35.093
  Top Layer w0.4: J5.1 90.075,34.575 90.075,33.604 90.36,33.32 100.37,33.32 100.55,33.5
  Top Layer w0.5: FB1.1 100.55,33.5 C12.2@100.55,35.093
XTAL_IN: C2.1 R3.2 X1.3 | length 7.2
  Top Layer w0.3: R3.2 C2.1 83.15,94.357 83.857,93.65 X1.3
pads on no net: J2.2 J2.4 J3.2 J3.4 J5.4 J5.6 J5.7 J5.8 J5.9 J5.10 J5.11

## Silkscreen, mask and mechanical layers (free items; w line width, h text height)
Mechanical 1:
  the board outline again, w0.254

## Text inside footprints (layer, text, board x,y; h text height)
D1: Mechanical 13 "+" at 111.733,95 h1 r180
D2: Mechanical 13 "+" at 111.733,91 h1 r180
D3: Mechanical 13 "+" at 111.733,87 h1 r180
D4: Mechanical 13 "+" at 111.733,83 h1 r180
D5: Mechanical 13 "+" at 111.733,79 h1 r180
D6: Mechanical 13 "+" at 111.733,75 h1 r180
D7: Mechanical 13 "+" at 92.5,48.217 h1 r90